# Altium PCB PCB1.PcbDoc
Units mm, origin at the board's own origin, x right, y up, seen from the top; angles counter-clockwise.
Board outline 149.86 x 90.93 mm, 2 copper layers (Top Layer, Bottom Layer); 68 components, 29 nets, 246 pads, 0 vias.
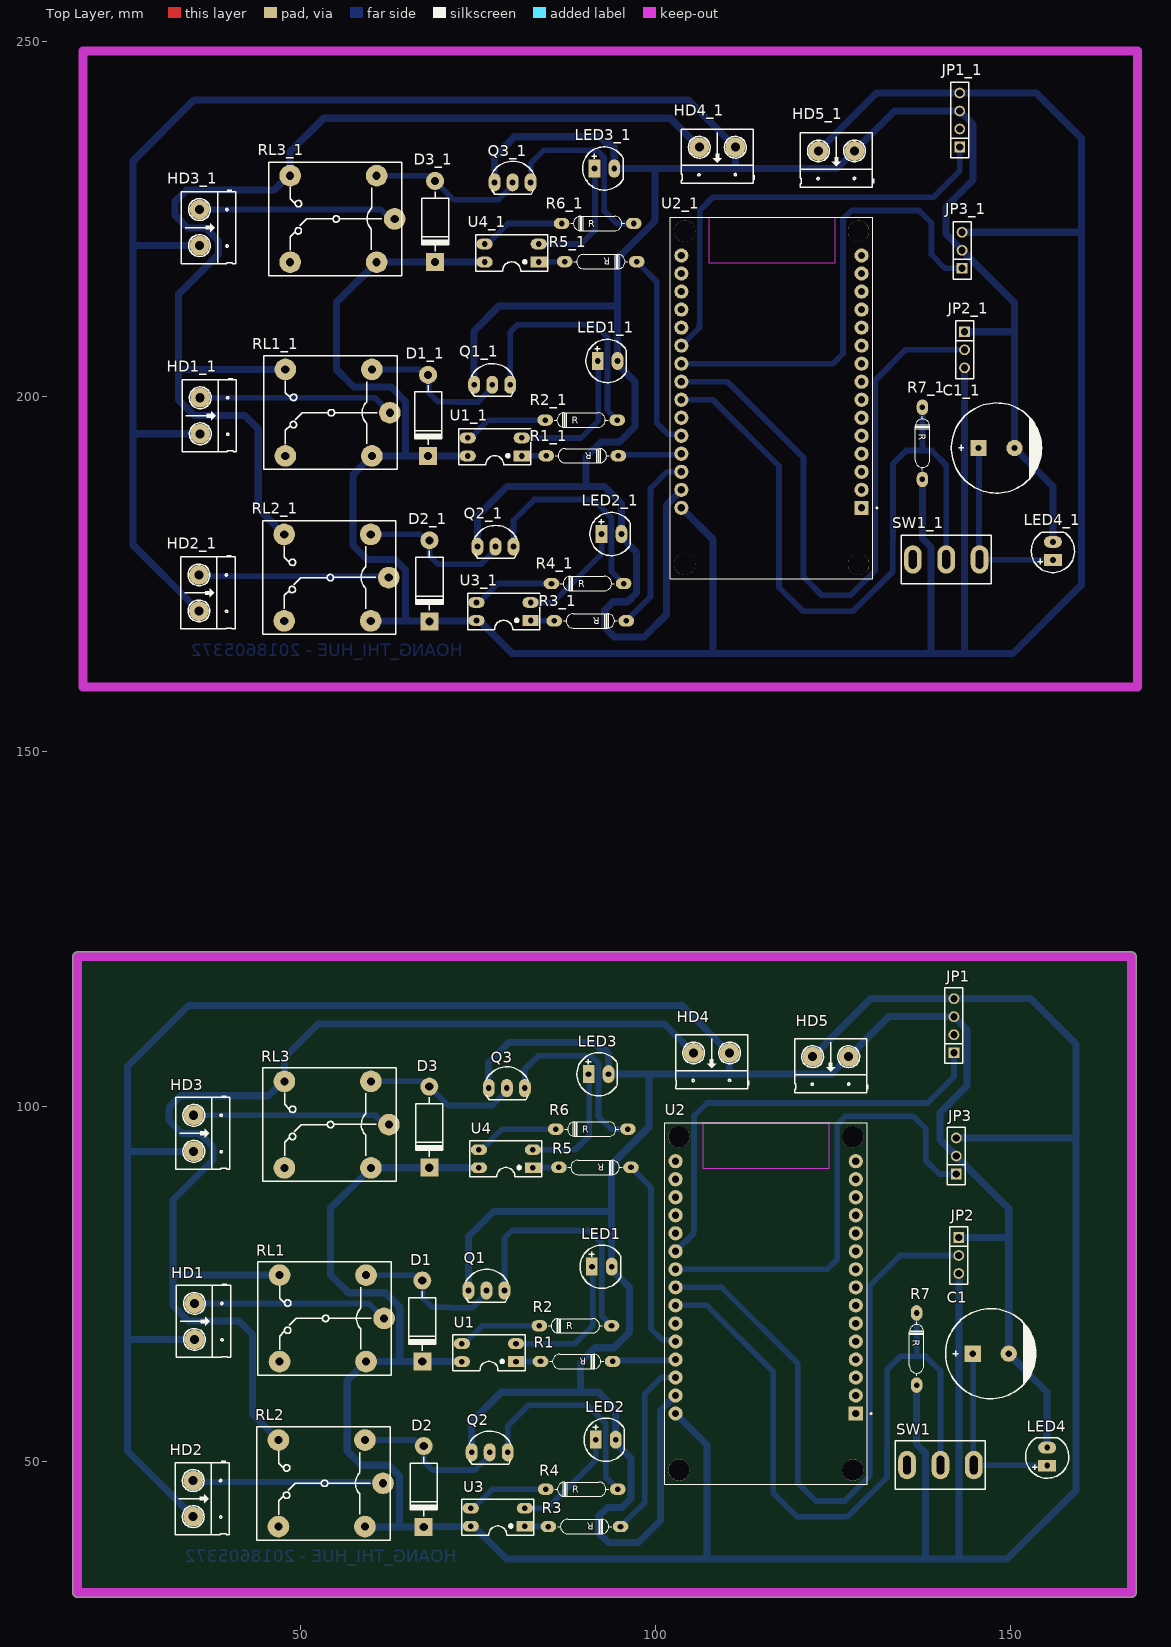
[diagram p0: Top Layer view]
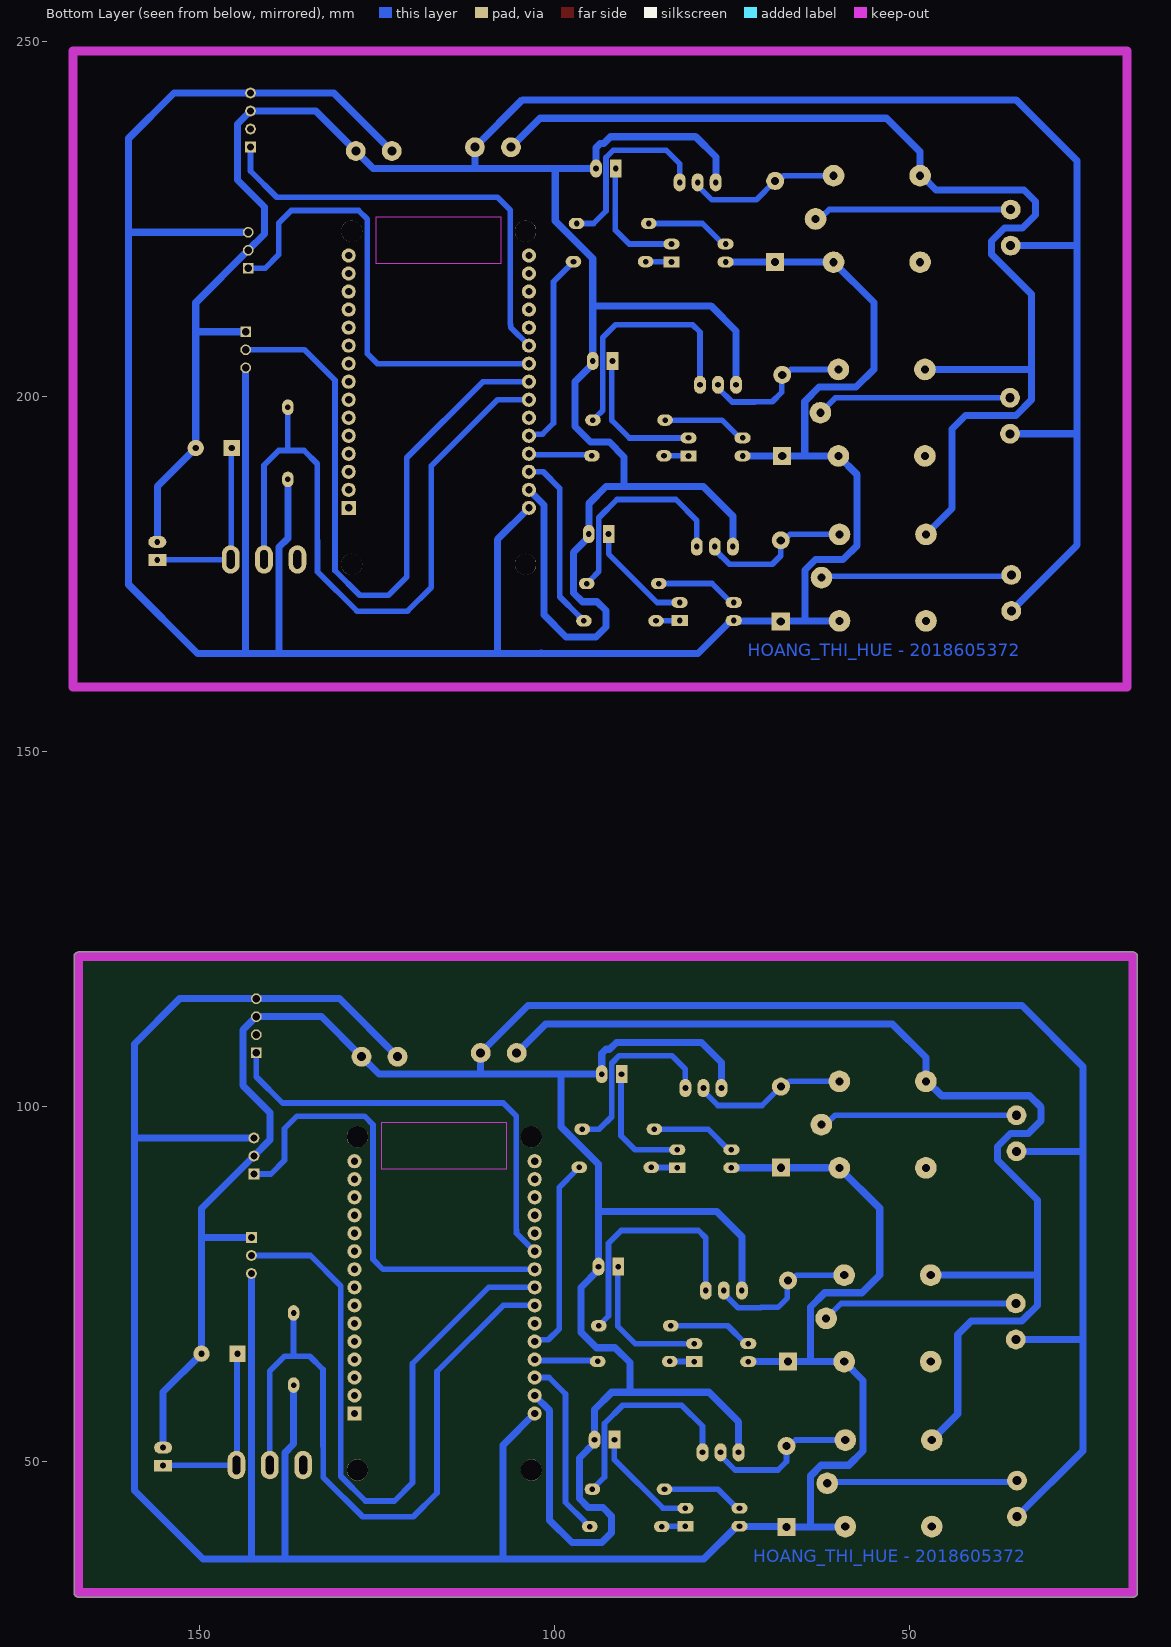
[diagram p1: Bottom Layer view, seen from below]

## Layer stack, top to bottom
Top Solder: solder mask 0.0102, Solder Resist, Dk 3.5
Top Layer: signal copper 0.0356
Dielectric 1: dielectric 0.32, FR-4, Dk 4.8
Bottom Layer: signal copper 0.0356
Bottom Solder: solder mask 0.0102, Solder Resist, Dk 3.5

## Board outline
17.856,31.445 17.856,121.107 cw(c18.491,121.107) 18.491,121.743 167.081,121.743 cw(c167.081,121.107) 167.717,121.107 167.717,31.445 cw(c167.081,31.445) 167.081,30.81 18.491,30.81 cw(c18.491,31.445)

## Design rules (kind name [scope] priority, off if disabled: settings)
Clearance [All] p1: gap=0.008 ignorepadtopadclearanceinfootprint=FALSE
PolygonConnect [All] p1: connectstyle=Relief reliefconductorwidth=0.254 reliefentries=4 polygonreliefangle="90 Angle" airgapwidth=0.254
RoutingLayers [All] p1: top layer_v5=FALSE bottom layer_v5=TRUE
RoutingVias [All] p1: holewidth=0.711 width=1.27 viastyle="Through Hole" minholewidth=0.711 minwidth=1.27 maxholewidth=0.711 maxwidth=1.27
SolderMaskExpansion [All] p1: expansion=0.102 istentingtop=FALSE
Width VCC_12V [InNet('+12')] p1: maxlimit=1 minlimit=1 preferedwidth=1
Width GND [InNet('GND')] p2: maxlimit=1 minlimit=1 preferedwidth=1
Width VCC_5V [InNet('+5')] p3: maxlimit=1 minlimit=1 preferedwidth=1
Width NET [All] p4: maxlimit=0.8 minlimit=0.8 preferedwidth=0.8
29 further rules are at their usual default settings.

## Classes and differential pairs
component class Sheet1: C1 D1 D2 D3 HD4 HD5 JP1 JP2 JP3 LED1 LED2 LED3 LED4 Q1 Q2 Q3 R1 R2 R3 R4 R5 R6 R7 RL1 RL2 RL3 SW1 U1 U2 U3 U4

## Components (designator, comment, footprint, x,y, rotation, side; value= is the part's Value field where it differs from the comment)
C1 "Cap Pol3" CP2/5 144.678,65.126 r0 top value=C?
C1_1 "Cap Pol3" CP2/5 145.491,192.761 r0 top value=C? (schematic designator C1)
D1 "1N4007" D2A 67.107,64.008 r90 top
D1_1 "1N4007" D2A 67.92,191.643 r90 top (schematic designator D1)
D2 "1N4007" D2A 67.31,40.691 r90 top
D2_1 "1N4007" D2A 68.123,168.326 r90 top (schematic designator D2)
D3 "1N4007" D2A 68.097,91.338 r90 top
D3_1 "1N4007" D2A 68.91,218.973 r90 top (schematic designator D3)
HD1 "Header 2" HED2 35.001,72.212 r270 top
HD1_1 "Header 2" HED2 35.814,199.847 r270 top (schematic designator HD1)
HD2 "Header 2" HED2 34.823,47.244 r270 top
HD2_1 "Header 2" HED2 35.636,174.879 r270 top (schematic designator HD2)
HD3 "Header 2" HED2 34.9,98.73 r270 top
HD3_1 "Header 2" HED2 35.712,226.365 r270 top (schematic designator HD3)
HD4 "Header 2" HED2 110.414,107.518 r180 top
HD4_1 "Header 2" HED2 111.227,235.153 r180 top (schematic designator HD4)
HD5 "Header 2" HED2 127.203,106.985 r180 top
HD5_1 "Header 2" HED2 128.016,234.62 r180 top (schematic designator HD5)
JP1 "DO_AM_DAT" "JP 1x4 CT" 142.037,107.544 r90 top
JP1_1 "DO_AM_DAT" "JP 1x4 CT" 142.85,235.179 r90 top (schematic designator JP1)
JP2 "DHT22" "JP 1x3 CT" 142.723,81.509 r270 top
JP2_1 "DHT22" "JP 1x3 CT" 143.535,209.144 r270 top (schematic designator JP2)
JP3 "BRIGHT" "JP 1x3 CT" 142.367,90.449 r90 top
JP3_1 "BRIGHT" "JP 1x3 CT" 143.18,218.084 r90 top (schematic designator JP3)
LED1 "LED" LED-5TRED 92.405,77.394 r0 top value="LED 3 ly Single Colour"
LED1_1 "LED" LED-5TRED 93.218,205.029 r0 top value="LED 3 ly Single Colour" (schematic designator LED1)
LED2 "LED" LED-5TRED 92.964,53.01 r0 top value="LED 3 ly Single Colour"
LED2_1 "LED" LED-5TRED 93.777,180.645 r0 top value="LED 3 ly Single Colour" (schematic designator LED2)
LED3 "LED" LED-5TRED 91.948,104.521 r0 top value="LED 3 ly Single Colour"
LED3_1 "LED" LED-5TRED 92.761,232.156 r0 top value="LED 3 ly Single Colour" (schematic designator LED3)
LED4 "LED" LED-5-RED 155.169,49.352 r90 top value="LED 3 ly Single Colour"
LED4_1 "LED" LED-5-RED 155.981,176.987 r90 top value="LED 3 ly Single Colour" (schematic designator LED4)
Q1 "C1815" QTO-92 76.149,74.041 r0 top
Q1_1 "C1815" QTO-92 76.962,201.676 r0 top (schematic designator Q1)
Q2 "C1815" QTO-92 76.606,51.232 r0 top
Q2_1 "C1815" QTO-92 77.419,178.867 r0 top (schematic designator Q2)
Q3 "C1815" QTO-92 79.019,102.565 r0 top
Q3_1 "C1815" QTO-92 79.832,230.2 r0 top (schematic designator Q3)
R1 "1k" "DIEN TRO 1/4 W" 93.929,64.033 r180 top value="R1/4W - 1K"
R1_1 "1k" "DIEN TRO 1/4 W" 94.742,191.668 r180 top value="R1/4W - 1K" (schematic designator R1)
R2 "510" "DIEN TRO 1/4 W" 83.617,69.063 r0 top value="R1/4W - 1K"
R2_1 "510" "DIEN TRO 1/4 W" 84.43,196.698 r0 top value="R1/4W - 1K" (schematic designator R2)
R3 "1k" "DIEN TRO 1/4 W" 95.047,40.767 r180 top value="R1/4W - 1K"
R3_1 "1k" "DIEN TRO 1/4 W" 95.86,168.402 r180 top value="R1/4W - 1K" (schematic designator R3)
R4 "510" "DIEN TRO 1/4 W" 84.506,46.025 r0 top value="R1/4W - 1K"
R4_1 "510" "DIEN TRO 1/4 W" 85.319,173.66 r0 top value="R1/4W - 1K" (schematic designator R4)
R5 "1k" "DIEN TRO 1/4 W" 96.52,91.389 r180 top value="R1/4W - 1K"
R5_1 "1k" "DIEN TRO 1/4 W" 97.333,219.024 r180 top value="R1/4W - 1K" (schematic designator R5)
R6 "510" "DIEN TRO 1/4 W" 85.928,96.774 r0 top value="R1/4W - 1K"
R6_1 "510" "DIEN TRO 1/4 W" 86.741,224.409 r0 top value="R1/4W - 1K" (schematic designator R6)
R7 "10K" "DIEN TRO 1/4 W" 136.779,70.866 r270 top value="R1/4W - 1K"
R7_1 "10K" "DIEN TRO 1/4 W" 137.592,198.501 r270 top value="R1/4W - 1K" (schematic designator R7)
RL1 "Relay 5V" RL_SPDT_10A 61.722,70.104 r180 top value="Relay SPDT, 10A, 12V"
RL1_1 "Relay 5V" RL_SPDT_10A 62.535,197.739 r180 top value="Relay SPDT, 10A, 12V" (schematic designator RL1)
RL2 "Relay 5V" RL_SPDT_10A 61.57,46.863 r180 top value="Relay SPDT, 10A, 12V"
RL2_1 "Relay 5V" RL_SPDT_10A 62.382,174.498 r180 top value="Relay SPDT, 10A, 12V" (schematic designator RL2)
RL3 "Relay 5V" RL_SPDT_10A 62.408,97.409 r180 top value="Relay SPDT, 10A, 12V"
RL3_1 "Relay 5V" RL_SPDT_10A 63.221,225.044 r180 top value="Relay SPDT, 10A, 12V" (schematic designator RL3)
SW1 "7101P3YZQE" SW_TOGGLE_7101P3YZQE 140.131,49.428 r180 top
SW1_1 "7101P3YZQE" SW_TOGGLE_7101P3YZQE 140.944,177.063 r180 top (schematic designator SW1)
U1 "PC817" DIP4/W0.3 80.315,64.008 r90 top
U1_1 "PC817" DIP4/W0.3 81.128,191.643 r90 top (schematic designator U1)
U2 "ESP32-DEVKIT-V1" MODULE_ESP32_DEVKIT_V1 115.504,72.21 r180 top
U2_1 "ESP32-DEVKIT-V1" MODULE_ESP32_DEVKIT_V1 116.317,199.845 r180 top (schematic designator U2)
U3 "PC817" DIP4/W0.3 81.559,40.818 r90 top
U3_1 "PC817" DIP4/W0.3 82.372,168.453 r90 top (schematic designator U3)
U4 "PC817" DIP4/W0.3 82.702,91.338 r90 top
U4_1 "PC817" DIP4/W0.3 83.515,218.973 r90 top (schematic designator U4)

## Footprints (in the part's own frame and the unit in brackets; to place one, negate y for a bottom-side part, rotate by r counter-clockwise, add the part's x,y. Pads: shape width x height; smd on the part's side, far side on the other; paste and mask are expansions set on the pad)
CP2/5 [mil]
  rect 90x90 hole 35: 1(0,0)
  round 90 hole 35: 2(200,0)
  silkscreen extent -150,-250 350,250, body extent -142,-246 350,246, height 984
D2A [mil] "Diode 2A, W 150mil, L 450mil"
  round 100 hole 45: 1(450,0)
  rect 100x100 hole 45: 2(0,0)
  silkscreen extent 61,-75 391,75, body extent 5,-47 435,54, height 100
"DIEN TRO 1/4 W" [mm]
  oval 2.2x1.6 hole 0.787: 1(0,0) 2(10.16,0)
  silkscreen extent 1.26,-1.02 8.88,1.02, body extent -0.3,-1.16 10.46,1.16, height 2.93
DIP4/W0.3 [mil] "4 PIN, W 300mil, Pin to pin 100mil"
  rect 60x90 hole 31: 1(0,0)
  oval 60x90 hole 31: 2(100,0) 3(100,300) 4(0,300)
  silkscreen extent -50,-50 150,350, body extent -59,-10 159,305, height 170
HED2 [mil] "Header 2, 2 pin, hight 300mil, Pin to Pin 200, Colour Green"
  round 110 hole 50: 1(0,0) 2(200,0)
  silkscreen extent -106,-100 300,200, body extent -92,-140 302,155, height 394
"JP 1x3 CT" [mm]
  rect 1.52x1.52 hole 1.02: 1(0,0)
  round 1.52 hole 1.02: 2(2.54,0) 3(5.08,0)
  silkscreen extent -1.52,-1.27 6.6,1.27, body extent -1.52,-1.25 6.6,1.25, height 8.51
"JP 1x4 CT" [mm]
  rect 1.52x1.52 hole 1.02: 1(0,0)
  round 1.52 hole 1.02: 2(2.54,0) 3(5.08,0) 4(7.62,0)
  silkscreen extent -1.52,-1.27 9.14,1.27, body extent -1.52,-1.25 9.14,1.25, height 8.51
LED-5-RED [mil] "LED 2 PIN, 5 ly , Only colour,pin to pin 100mil"
  rect 65x100 hole 32: 1(0,0)
  oval 65x100 hole 32: 2(100,0)
  silkscreen extent -70,-120 154,120, body extent -65,-119 149,118, height 339
LED-5TRED [mil] "LED 2 PIN, 5 ly , Only colour, pin to pin 110mil"
  rect 65x100 hole 32: 1(-55,0)
  oval 65x100 hole 32: 2(55,0)
  silkscreen extent -120,-120 104,120, body extent -116,-117 98,120, height 339
MODULE_ESP32_DEVKIT_V1 [mm]
  rect 2x2 hole 1.02: 1(-12.7,15.515)
  round 2 hole 1.02: 2(-12.7,12.975) 3(-12.7,10.435) 4(-12.7,7.895) 5(-12.7,5.355) 6(-12.7,2.815) 7(-12.7,0.275) 8(-12.7,-2.265) 9(-12.7,-4.805) 10(-12.7,-7.345) 11(-12.7,-9.885) 12(-12.7,-12.425) 13(-12.7,-14.965) 14(-12.7,-17.505) 15(-12.7,-20.045) 16(12.7,-20.045) 17(12.7,-17.505) 18(12.7,-14.965) 19(12.7,-12.425) 20(12.7,-9.885) 21(12.7,-7.345) 22(12.7,-4.805) 23(12.7,-2.265) 24(12.7,0.275) 25(12.7,2.815) 26(12.7,5.355) 27(12.7,7.895) 28(12.7,10.435) 29(12.7,12.975) 30(12.7,15.515)
  round 3 hole 3 unplated: ""(-12.28,23.475) ""(-12.28,-23.475) ""(12.23,23.475) ""(12.23,-23.475)
  Keep-Out Layer region: 8.78,-25.475 -8.91,-25.475 -8.91,-18.985 8.78,-18.985
  Keep-Out Layer region: 8.78,-25.475 -8.91,-25.475 -8.91,-18.985 8.78,-18.985
  Keep-Out Layer region: 8.78,-25.475 -8.91,-25.475 -8.91,-18.985 8.78,-18.985
  silkscreen extent -14.95,-25.48 14.23,25.48
QTO-92 [mil] "TO-92"
  oval 66x100 hole 32: 1(-100,0) 2(0,0) 3(100,0)
  silkscreen extent -117,-65 120,118, body extent -109,-66 109,95, height 245
RL_SPDT_10A [mil] "Relay SPDT, 5 pin, 10A,W 650mil, L 800mil, H 800mil"
  round 120 hole 45: 1(0,0) 2(580,240) 3(580,-240) 4(100,-240) 5(100,240)
  silkscreen extent -40,-315 700,315, body extent -33,-307 719,303, height 642
SW_TOGGLE_7101P3YZQE [mm]
  oval 2.5x4 hole 2.6 slot 1.1 at 0 deg: 1(-4.7,0) 2(0,0) 3(4.7,0)
  silkscreen extent -6.35,-3.4 6.35,3.4, body extent -6.35,-3.38 6.35,3.38, height 30.93

## Part data
C1 C1_1: "Polarized Capacitor (Surface Mount)", LatestRevisionDate=17-Jul-2002, LatestRevisionNote="Re-released for DXP Platform.", PackageReference=C0805, Publisher="Altium Limited"
D1 D1_1 D2 D2_1 D3 D3_1: library part D1A, "Diode 1A"
HD1 HD1_1 HD2 HD2_1 HD3 HD3_1 HD4 HD4_1 HD5 HD5_1: library part Hed2, "Header 2 (Green)"
JP1 JP1_1: library part "JP 1x4 2.54 Cai Thang", "Cắm", Chung_Loai=Cắm, Don_Vi=Con, Ma_Hang=MH004006, Ten_Linh_Kien="Jump Đơn Cái 2.54MM 1x20P Thẳng"
JP2 JP2_1 JP3 JP3_1: library part "JP 1x3 2.54 Cai Thang", "Cắm", Chung_Loai=Cắm, Don_Vi=Con, Ma_Hang=MH004006, Ten_Linh_Kien="Jump Đơn Cái 2.54MM 1x20P Thẳng"
LED1 LED1_1 LED2 LED2_1 LED3 LED3_1 LED4 LED4_1: "LED Single colour Green and Red"
Q1 Q1_1 Q2 Q2_1 Q3 Q3_1: "NPN 600mW, ECB"
R1 R1_1 R2 R2_1 R3 R3_1 R4 R4_1 R5 R5_1 R6 R6_1 R7 R7_1: library part Res, "Resistor 1/4W"
RL1 RL1_1 RL2 RL2_1 RL3 RL3_1: library part "Relay 1", "Relay SPDT,10A - 12VDC 5 Pin"
SW1 SW1_1: library part SW_TOGGLE_7101P3YZQE, "SWITCH TOGGLE SPDT 5A 120V", Current Rating="5A (AC/DC)", Illumination Type, Color=-, Manufacturer=C&K, Operating Temperature="-30°C ~ 85°C", Supplier Part Number 1=CKN1019-ND, Voltage Rating - AC=120V, Voltage Rating - DC=28V, Actuator Length=11.43mm, Actuator Material="Brass, Chrome Plated", Actuator Type="Flat Anti-Rotation", Bushing Thread=1/4-40, Category=Switches, Circuit=SPDT, ComponentLink1Description=http://www.ckswitches.com/media/1394/7000toggle.pdf, ComponentLink1URL=http://www.ckswitches.com/media/1394/7000toggle.pdf, Electrical Life="100,000 Cycles", Features="Epoxy Sealed Terminals", Illumination=Non-Illuminated, Illumination Voltage (Nominal)=-, Ingress Protection=-, Manufacturer Part Number=7101P3YZQE, Mounting Type="Panel Mount", Packaging=Bulk, Panel Cutout Dimensions="Circular - 6.35mm Dia", Part Status=Active, Pricing 1="1=6.11, 10=5.801, 25=5.648, 50=5.4954, 100=5.3428, 250=5.03744, 500=4.2742, 1000=4.04523 (USD)", RoHS="RoHS Compliant", Stock 1=933, Supplier 1=Digi-Key, Switch Function=On-On, Termination Style="Solder Lug"
U1 U1_1 U3 U3_1 U4 U4_1: "Single Opto"
U2 U2_1: "Dual core, Wi-Fi: 2.4 GHz up to 150 Mbits/s,BLE (Bluetooth Low Energy) and legacy Bluetooth, 32 bits, Up to 240 MHz", Package=None, Availability="Not in stock", Check_prices=https://www.snapeda.com/parts/ESP32-DEVKIT-V1/Do+it/view-part/?ref=eda, MF="Do it", MP=ESP32-DEVKIT-V1, Price=None, SnapEDA_Link=https://www.snapeda.com/parts/ESP32-DEVKIT-V1/Do+it/view-part/?ref=snap

## Nets (pads, with @x,y where several pads share a name; then routed paths per layer and width w, separated by ;. In a path a pad name is that pad's centre, name@x,y a point inside that pad or via, vN(x,y) a via of type N, cw(c..) or ccw(c..) an arc to the next point about the centre after c; other vN are vias at no path point)
+5: D1.2 D2.2 D3.2 HD5.2 JP1.4 JP2.3 JP3.3 R7.2 RL1.5 RL2.5 RL3.5 U1.4 U2.30 U3.4 U4.4 | length 412.2
  Bottom Layer w1: RL2.5 59.068,40.729 64.008,40.729 ; U1.4 D1.2 63.932,64.008 ; U4.4 D3.2 68.085,91.326 59.88,91.326 RL3.5 54.178,85.623 54.178,76.225 56.693,73.711 61.925,73.711 63.932,71.704 63.932,64.008 ; 101.067,36.22 101.117,36.17 ; U2.30@102.804,56.634 U2.30 107.239,52.26 107.239,36.17 ; HD5.2 130.302,115.164 JP1.4 152.832,115.164 159.207,108.788 159.207,95.479 ; R7.2 136.779,52.391 137.998,51.172 137.998,36.22 138.049,36.17 ; JP3.3 159.156,95.529 159.207,95.479 ; JP2.3 142.723,36.246 142.799,36.17 ; 63.932,64.008 RL1.5 56.54,61.366 56.54,51.41 58.547,49.403 62.433,49.403 63.906,47.93 63.906,40.831 64.008,40.729 ; 64.008,40.729 67.272,40.729 D2.2 67.373,40.754 73.876,40.754 U3.4 74.32,40.818 78.969,36.17 101.117,36.17 ; 101.117,36.17 107.239,36.17 ; 107.239,36.17 138.049,36.17 ; 138.049,36.17 142.799,36.17 ; 142.799,36.17 149.53,36.17 159.207,45.847 159.207,95.479
+12: HD4.2 RL1.3 RL2.3 RL3.3 | length 161.1
  Bottom Layer w1: RL2.3 43.18,56.617 43.18,67.818 41.275,69.723 34.163,69.723 31.953,71.933 31.953,76.352 ; RL1.3 32.106,76.2 31.953,76.352 ; HD4.2 101.244,111.608 52.4,111.608 47.676,106.883 RL3.3 47.449,103.505 45.424,101.48 33.053,101.48 31.42,99.847 31.42,97.968 33.249,96.139 35.763,96.139 37.592,94.31 37.592,92.431 31.953,86.792 31.953,76.352
DATA: JP1.1 U2.21 | length 62.5
  Bottom Layer w0.8: U2.21 105.359,82.11 105.359,82.525 105.41,82.575 105.41,98.628 107.239,100.457 138.328,100.457 142.037,104.165 JP1.1
DATA_Bright: JP3.1 U2.22 | length 65.6
  Bottom Layer w0.8: U2.22 124.157,77.015 125.578,78.435 125.578,97.384 126.797,98.603 136.296,98.603 138.049,96.85 138.049,92.38 139.979,90.449 JP3.1
DATA_DHT22: JP2.2 U2.23 | length 92.3
  Bottom Layer w0.8: U2.23 109.294,74.475 120.015,63.754 120.015,46.939 122.58,44.374 126.644,44.374 130.124,47.854 130.124,74.676 134.417,78.969 JP2.2
GND: C1.2 HD1.2 HD2.2 HD3.2 HD4.1 HD5.1 JP1.3 JP2.1 JP3.2 LED1.2 LED2.2 LED3.2 LED4.2 Q1.1 Q2.1 Q3.1 U2.29 | length 493.6
  Bottom Layer w1: HD2.2 25.552,51.435 25.552,67.081 ; HD3.2 25.756,93.65 25.552,93.853 ; HD1.2 25.603,67.132 25.552,67.081 ; Q1.1 73.609,81.636 77.14,85.166 93.802,85.166 ; Q2.1 74.066,55.524 78.232,59.69 89.383,59.69 ; Q3.1 76.454,102.591 76.454,106.147 79.299,108.991 91.288,108.991 92.253,108.026 92.759,108.026 93.345,107.44 LED3.2 99.085,104.521 ; U2.29 100.686,57.116 100.686,41.631 97.561,38.506 93.345,38.506 91.956,39.896 91.956,42.223 93.193,43.459 95.25,43.459 96.495,44.704 96.495,50.432 94.361,52.565 LED2.2 94.361,57.277 91.948,59.69 89.383,59.69 ; JP2.1 149.581,81.509 149.758,81.331 ; LED4.2 155.169,59.715 C1.2 149.758,81.331 ; 25.552,67.081 25.552,93.853 ; 25.552,93.853 25.552,105.613 34.138,114.198 103.734,114.198 HD4.1 110.414,104.597 110.49,104.521 ; 89.383,59.69 89.383,63.881 91.465,65.964 94.107,65.964 96.291,68.148 96.291,74.46 93.802,76.949 LED1.2 93.802,85.166 ; 93.802,85.166 93.802,91.821 99.085,97.104 99.085,104.521 ; 99.085,104.521 110.49,104.521 ; 110.49,104.521 124.739,104.521 HD5.1 132.842,112.624 JP1.3 143.891,110.769 143.891,102.895 140.081,99.085 140.081,95.275 JP3.2 149.758,85.598 149.758,81.331
INT1: R1.1 U2.27 | length 9
  Bottom Layer w0.8: R1.1 94.07,64.174 102.664,64.174 U2.27
INT2: R3.1 U2.28 | length 25.5
  Bottom Layer w0.8: R3.1 95.13,40.767 95.747,41.383 95.747,41.467 98.45,44.171 98.45,59.436 100.789,61.775 U2.28
INT3: R5.1 U2.26 | length 28.2
  Bottom Layer w0.8: R5.1 96.604,91.389 96.973,91.02 96.973,90.936 99.339,88.57 99.339,68.631 100.886,67.084 102.575,67.084 U2.26
MODE: R7.1 SW1.2 U2.24 | length 98.2
  Bottom Layer w0.8: U2.24 107.237,71.935 116.561,62.611 116.561,45.491 119.913,42.139 127.025,42.139 132.588,47.701 132.588,52.045 132.639,52.095 132.639,62.916 134.493,64.77 136.855,64.77 ; R7.1 136.779,64.846 136.855,64.77 ; SW1.2 140.131,62.688 138.049,64.77 136.855,64.77
NetC1_1: C1.1 LED4.1 SW1.1 | length 26.1
  Bottom Layer w0.8: C1.1 144.755,65.049 144.755,49.505 SW1.1 144.869,49.39 155.13,49.39 LED4.1
NetD1_1: D1.1 Q1.2 RL1.4 | length 21.5
  Bottom Layer w0.8: RL1.4 65.874,76.2 66.636,75.438 D1.1 67.189,75.356 67.189,72.968 68.504,71.653 70.891,71.653 70.942,71.603 74.143,71.603 76.149,73.609 Q1.2
NetD2_1: D2.1 Q2.2 RL2.4 | length 21.9
  Bottom Layer w0.8: RL2.4 66.001,52.959 66.839,52.121 D2.1 67.31,49.936 68.504,48.743 74.549,48.743 76.606,50.8 Q2.2
NetD3_1: D3.1 Q3.2 RL3.4 | length 21.8
  Bottom Layer w0.8: RL3.4 66.89,103.505 67.627,102.768 D3.1 70.764,100.101 76.987,100.101 79.019,102.133 Q3.2
NetHD1_1: HD1.1 RL1.1 | length 27.6
  Bottom Layer w0.8: HD1.1 59.614,72.212 RL1.1
NetHD2_1: HD2.1 RL2.1 | length 26.9
  Bottom Layer w0.8: HD2.1 35.014,47.053 61.379,47.053 RL2.1
NetHD3_1: HD3.1 RL3.1 | length 28.1
  Bottom Layer w0.8: HD3.1 60.479,98.73 61.799,97.409 RL3.1
NetLED1_1: LED1.1 U1.2 | length 20.2
  Bottom Layer w0.8: U1.2 88.646,66.548 91.11,69.012 91.11,77.292 LED1.1
NetLED2_1: LED2.1 U3.2 | length 15.7
  Bottom Layer w0.8: U3.2 84.734,43.358 91.567,50.19 LED2.1
NetLED3_1: LED3.1 U4.2 | length 17.5
  Bottom Layer w0.8: U4.2 88.671,93.878 90.627,95.834 90.627,104.445 LED3.1
NetQ1_3: Q1.3 R2.2 | length 34.6
  Bottom Layer w0.8: Q1.3 78.689,81.458 79.731,82.499 90.602,82.499 92.405,80.696 92.405,70.434 93.324,69.516 93.324,69.432 93.693,69.063 R2.2
NetQ2_3: Q2.3 R4.2 | length 29.8
  Bottom Layer w0.8: Q2.3 79.146,54.915 82.093,57.861 90.399,57.861 92.964,55.296 92.964,47.727 94.213,46.478 94.213,46.394 94.582,46.025 R4.2
NetQ3_3: Q3.3 R6.2 | length 26.7
  Bottom Layer w0.8: Q3.3 81.559,105.207 83.464,107.112 90.895,107.112 91.948,106.059 91.948,98.527 93.701,96.774 R6.2
NetR1_2: R1.2 U1.1 | length 3.5
  Bottom Layer w0.8: U1.1 80.328,64.021 83.757,64.021 R1.2
NetR2_1: R2.1 U1.3 | length 12
  Bottom Layer w0.8: U1.3 73.076,66.548 75.59,69.063 R2.1
NetR3_2: R3.2 U3.1 | length 3.3
  Bottom Layer w0.8: U3.1 81.585,40.792 84.861,40.792 R3.2
NetR4_1: R4.1 U3.3 | length 11.7
  Bottom Layer w0.8: U3.3 74.32,43.358 76.987,46.025 R4.1
NetR5_2: R5.2 U4.1 | length 3.7
  Bottom Layer w0.8: U4.1 82.728,91.364 86.335,91.364 R5.2
NetR6_1: R6.1 U4.3 | length 12
  Bottom Layer w0.8: U4.3 75.463,93.878 78.359,96.774 R6.1
pads on no net: C1_1.1 C1_1.2 D1_1.1 D1_1.2 D2_1.1 D2_1.2 D3_1.1 D3_1.2 HD1_1.1 HD1_1.2 HD2_1.1 HD2_1.2 HD3_1.1 HD3_1.2 HD4_1.1 HD4_1.2 HD5_1.1 HD5_1.2 JP1.2 JP1_1.1 JP1_1.2 JP1_1.3 JP1_1.4 JP2_1.1 JP2_1.2 JP2_1.3 JP3_1.1 JP3_1.2 JP3_1.3 LED1_1.1 LED1_1.2 LED2_1.1 LED2_1.2 LED3_1.1 LED3_1.2 LED4_1.1 LED4_1.2 Q1_1.1 Q1_1.2 Q1_1.3 Q2_1.1 Q2_1.2 Q2_1.3 Q3_1.1 Q3_1.2 Q3_1.3 R1_1.1 R1_1.2 R2_1.1 R2_1.2 R3_1.1 R3_1.2 R4_1.1 R4_1.2 R5_1.1 R5_1.2 R6_1.1 R6_1.2 R7_1.1 R7_1.2 RL1.2 RL1_1.1 RL1_1.2 RL1_1.3 RL1_1.4 RL1_1.5 RL2.2 RL2_1.1 RL2_1.2 RL2_1.3 RL2_1.4 RL2_1.5 RL3.2 RL3_1.1 RL3_1.2 RL3_1.3 RL3_1.4 RL3_1.5 SW1.3 SW1_1.1 SW1_1.2 SW1_1.3 U1_1.1 U1_1.2 U1_1.3 U1_1.4 U2. U2.1 U2.2 U2.3 U2.4 U2.5 U2.6 U2.7 U2.8 U2.9 U2.10 U2.11 U2.12 U2.13 U2.14 U2.15 U2.16 U2.17 U2.18 U2.19 U2.20 U2.25 U2_1. U2_1.1 U2_1.2 U2_1.3 U2_1.4 U2_1.5 U2_1.6 U2_1.7 U2_1.8 U2_1.9 U2_1.10 U2_1.11 U2_1.12 U2_1.13 U2_1.14 U2_1.15 U2_1.16 U2_1.17 U2_1.18 U2_1.19 U2_1.20 U2_1.21 U2_1.22 U2_1.23 U2_1.24 U2_1.25 U2_1.26 U2_1.27 U2_1.28 U2_1.29 U2_1.30 U3_1.1 U3_1.2 U3_1.3 U3_1.4 U4_1.1 U4_1.2 U4_1.3 U4_1.4
copper on no net: | length 1812.5
  Bottom Layer w0.8: 35.636,174.879 35.827,174.689 62.192,174.689 62.382,174.498 ; 35.712,226.365 61.291,226.365 62.612,225.044 63.221,225.044 ; 35.814,199.847 60.427,199.847 62.535,197.739 ; 59.842,180.594 66.814,180.594 67.652,179.756 68.123,179.756 68.123,177.571 69.317,176.378 75.362,176.378 77.419,178.435 77.419,178.867 ; 59.995,203.835 66.687,203.835 67.449,203.073 67.92,203.073 68.002,202.991 68.002,200.603 69.317,199.288 71.704,199.288 71.755,199.238 74.955,199.238 76.962,201.244 76.962,201.676 ; 60.681,231.14 67.703,231.14 68.439,230.403 68.91,230.403 71.577,227.736 77.8,227.736 79.832,229.768 79.832,230.2 ; 73.508,194.183 73.889,194.183 76.403,196.698 84.43,196.698 ; 74.752,170.993 75.133,170.993 77.8,173.66 85.319,173.66 ; 75.895,221.513 76.276,221.513 79.172,224.409 86.741,224.409 ; 79.502,201.676 79.502,209.093 80.543,210.134 91.415,210.134 93.218,208.331 93.218,198.069 94.137,197.151 94.137,197.067 94.506,196.698 94.59,196.698 ; 79.959,178.867 79.959,182.55 82.906,185.496 91.211,185.496 93.777,182.931 93.777,175.362 95.026,174.113 95.026,174.029 95.395,173.66 95.479,173.66 ; 81.128,191.643 81.14,191.656 84.569,191.656 84.582,191.668 ; 81.128,194.183 89.459,194.183 91.923,196.647 91.923,204.927 91.821,205.029 ; 82.372,168.453 82.398,168.427 85.674,168.427 85.7,168.402 ; 82.372,170.993 85.547,170.993 92.38,177.825 92.38,180.645 ; 82.372,230.2 82.372,232.842 84.277,234.747 91.708,234.747 92.761,233.694 92.761,226.162 94.513,224.409 96.901,224.409 ; 83.515,218.973 83.541,218.999 87.147,218.999 87.173,219.024 ; 83.515,221.513 89.484,221.513 91.44,223.469 91.44,232.08 91.364,232.156 ; 94.742,191.668 94.883,191.809 103.476,191.809 103.617,191.95 ; 95.86,168.402 95.943,168.402 96.56,169.018 96.56,169.102 99.263,171.806 99.263,187.071 101.602,189.41 103.617,189.41 ; 97.333,219.024 97.416,219.024 97.786,218.655 97.786,218.571 100.152,216.205 100.152,196.266 101.699,194.719 103.387,194.719 103.617,194.49 ; 103.617,199.57 108.05,199.57 117.373,190.246 117.373,173.126 120.726,169.774 127.838,169.774 133.401,175.336 133.401,179.68 133.452,179.73 133.452,190.551 135.306,192.405 137.668,192.405 ; 103.617,202.11 110.107,202.11 120.828,191.389 120.828,174.574 123.393,172.009 127.457,172.009 130.937,175.489 130.937,202.311 135.23,206.604 143.535,206.604 ; 103.617,204.65 124.97,204.65 126.39,206.07 126.39,225.019 127.61,226.238 137.109,226.238 138.862,224.485 138.862,220.015 140.792,218.084 143.18,218.084 ; 103.617,207.19 106.172,209.745 106.172,210.16 106.223,210.21 106.223,226.263 108.052,228.092 139.141,228.092 142.85,231.8 142.85,235.179 ; 137.592,198.501 137.592,192.481 137.668,192.405 ; 140.944,177.063 140.944,190.323 138.862,192.405 137.668,192.405 ; 145.491,192.761 145.567,192.684 145.567,177.14 145.644,177.063 145.682,177.025 155.943,177.025 155.981,176.987
  Bottom Layer w1: 35.636,169.799 26.365,179.07 26.365,194.716 ; 35.712,221.285 26.568,221.285 26.365,221.488 ; 35.814,194.767 26.416,194.767 26.365,194.716 ; 47.65,180.594 43.993,184.252 43.993,195.453 42.088,197.358 34.976,197.358 32.766,199.568 32.766,203.987 ; 47.803,203.835 32.918,203.835 32.766,203.987 ; 59.842,168.402 59.88,168.364 64.821,168.364 ; 73.508,191.643 67.92,191.643 64.745,191.643 ; 74.422,201.676 74.422,209.271 77.953,212.801 94.615,212.801 ; 74.879,178.867 74.879,183.159 79.045,187.325 90.195,187.325 ; 75.895,218.973 68.91,218.973 68.897,218.961 60.693,218.961 60.681,218.948 54.991,213.258 54.991,203.86 57.506,201.346 62.738,201.346 64.745,199.339 64.745,191.643 ; 77.292,230.2 77.267,230.226 77.267,233.782 80.112,236.626 92.1,236.626 93.066,235.661 93.572,235.661 94.158,235.075 94.158,232.156 99.898,232.156 ; 101.879,163.855 101.93,163.805 ; 103.617,184.269 103.617,184.33 108.052,179.895 108.052,163.805 ; 103.617,186.87 101.498,184.751 101.498,169.266 98.374,166.141 94.158,166.141 92.769,167.531 92.769,169.858 94.005,171.094 96.063,171.094 97.307,172.339 97.307,178.067 95.174,180.2 95.174,180.645 95.174,184.912 92.761,187.325 90.195,187.325 ; 106.147,235.153 102.057,239.243 53.213,239.243 48.489,234.518 48.489,231.14 48.261,231.14 46.237,229.115 33.865,229.115 32.233,227.482 32.233,225.603 34.061,223.774 36.576,223.774 38.405,221.945 38.405,220.066 32.766,214.427 32.766,203.987 ; 122.936,234.62 131.115,242.799 142.85,242.799 153.645,242.799 160.02,236.423 160.02,223.114 ; 137.592,188.341 137.592,180.026 138.811,178.807 138.811,163.855 138.862,163.805 ; 143.18,223.164 159.969,223.164 160.02,223.114 ; 143.535,204.064 143.535,163.881 143.612,163.805 ; 143.535,209.144 150.393,209.144 150.571,208.966 ; 155.981,179.527 155.981,187.35 150.571,192.761 150.571,208.966 ; 26.365,194.716 26.365,221.488 ; 26.365,221.488 26.365,233.248 34.95,241.833 104.546,241.833 111.227,235.153 111.227,232.232 111.303,232.156 ; 64.745,191.643 59.995,191.643 57.353,189.001 57.353,179.045 59.36,177.038 63.246,177.038 64.719,175.565 64.719,168.465 64.821,168.364 ; 64.821,168.364 68.085,168.364 68.123,168.326 68.186,168.389 74.689,168.389 74.752,168.453 75.133,168.453 79.781,163.805 101.93,163.805 ; 90.195,187.325 90.195,191.516 92.278,193.599 94.92,193.599 97.104,195.783 97.104,202.095 94.615,204.584 94.615,205.029 94.615,212.801 ; 94.615,212.801 94.615,219.456 99.898,224.739 99.898,232.156 ; 99.898,232.156 111.303,232.156 ; 101.93,163.805 108.052,163.805 ; 108.052,163.805 138.862,163.805 ; 111.303,232.156 125.552,232.156 128.016,234.62 133.655,240.259 142.85,240.259 144.704,238.404 144.704,230.53 140.894,226.72 140.894,222.91 143.18,220.624 150.571,213.233 150.571,208.966 ; 138.862,163.805 143.612,163.805 ; 143.612,163.805 150.343,163.805 160.02,173.482 160.02,223.114

## Keep-outs
Keep-Out Layer:
  lines w1.27: 18.491,31.445 18.491,121.107 167.081,121.107 167.081,31.445 18.491,31.445 ; 19.304,159.08 167.894,159.08 167.894,248.742 19.304,248.742 19.304,159.08

## Other copper
Bottom Layer:
  text "HOANG_THI_HUE - 2018605372" at 72.796,162.76 h3
  text "HOANG_THI_HUE - 2018605372" at 71.984,35.125 h3

## Text inside footprints (layer, text, board x,y; h text height)
R1: Top Overlay "R" at 90.183,64.554 h1 r180
R1_1: Top Overlay "R" at 90.995,192.189 h1 r180
R2: Top Overlay "R" at 87.363,68.542 h1
R2_1: Top Overlay "R" at 88.176,196.177 h1
R3: Top Overlay "R" at 91.3,41.288 h1 r180
R3_1: Top Overlay "R" at 92.113,168.923 h1 r180
R4: Top Overlay "R" at 88.252,45.504 h1
R4_1: Top Overlay "R" at 89.065,173.139 h1
R5: Top Overlay "R" at 92.773,91.91 h1 r180
R5_1: Top Overlay "R" at 93.586,219.545 h1 r180
R6: Top Overlay "R" at 89.675,96.253 h1
R6_1: Top Overlay "R" at 90.487,223.888 h1
R7: Top Overlay "R" at 136.258,67.12 h1 r270
R7_1: Top Overlay "R" at 137.071,194.754 h1 r270